# Altium PCB H7864-B-1.pcbdoc
Units mil, origin at the board's own origin, x right, y up, seen from the top; angles counter-clockwise.
Board outline 4210 x 5400 mil, 2 copper layers (Top Layer, Bottom Layer), stack 62.2 mil thick; 79 components, 38 nets, 224 pads, 40 vias.
Unrouted connection lines stored in the file: 1.
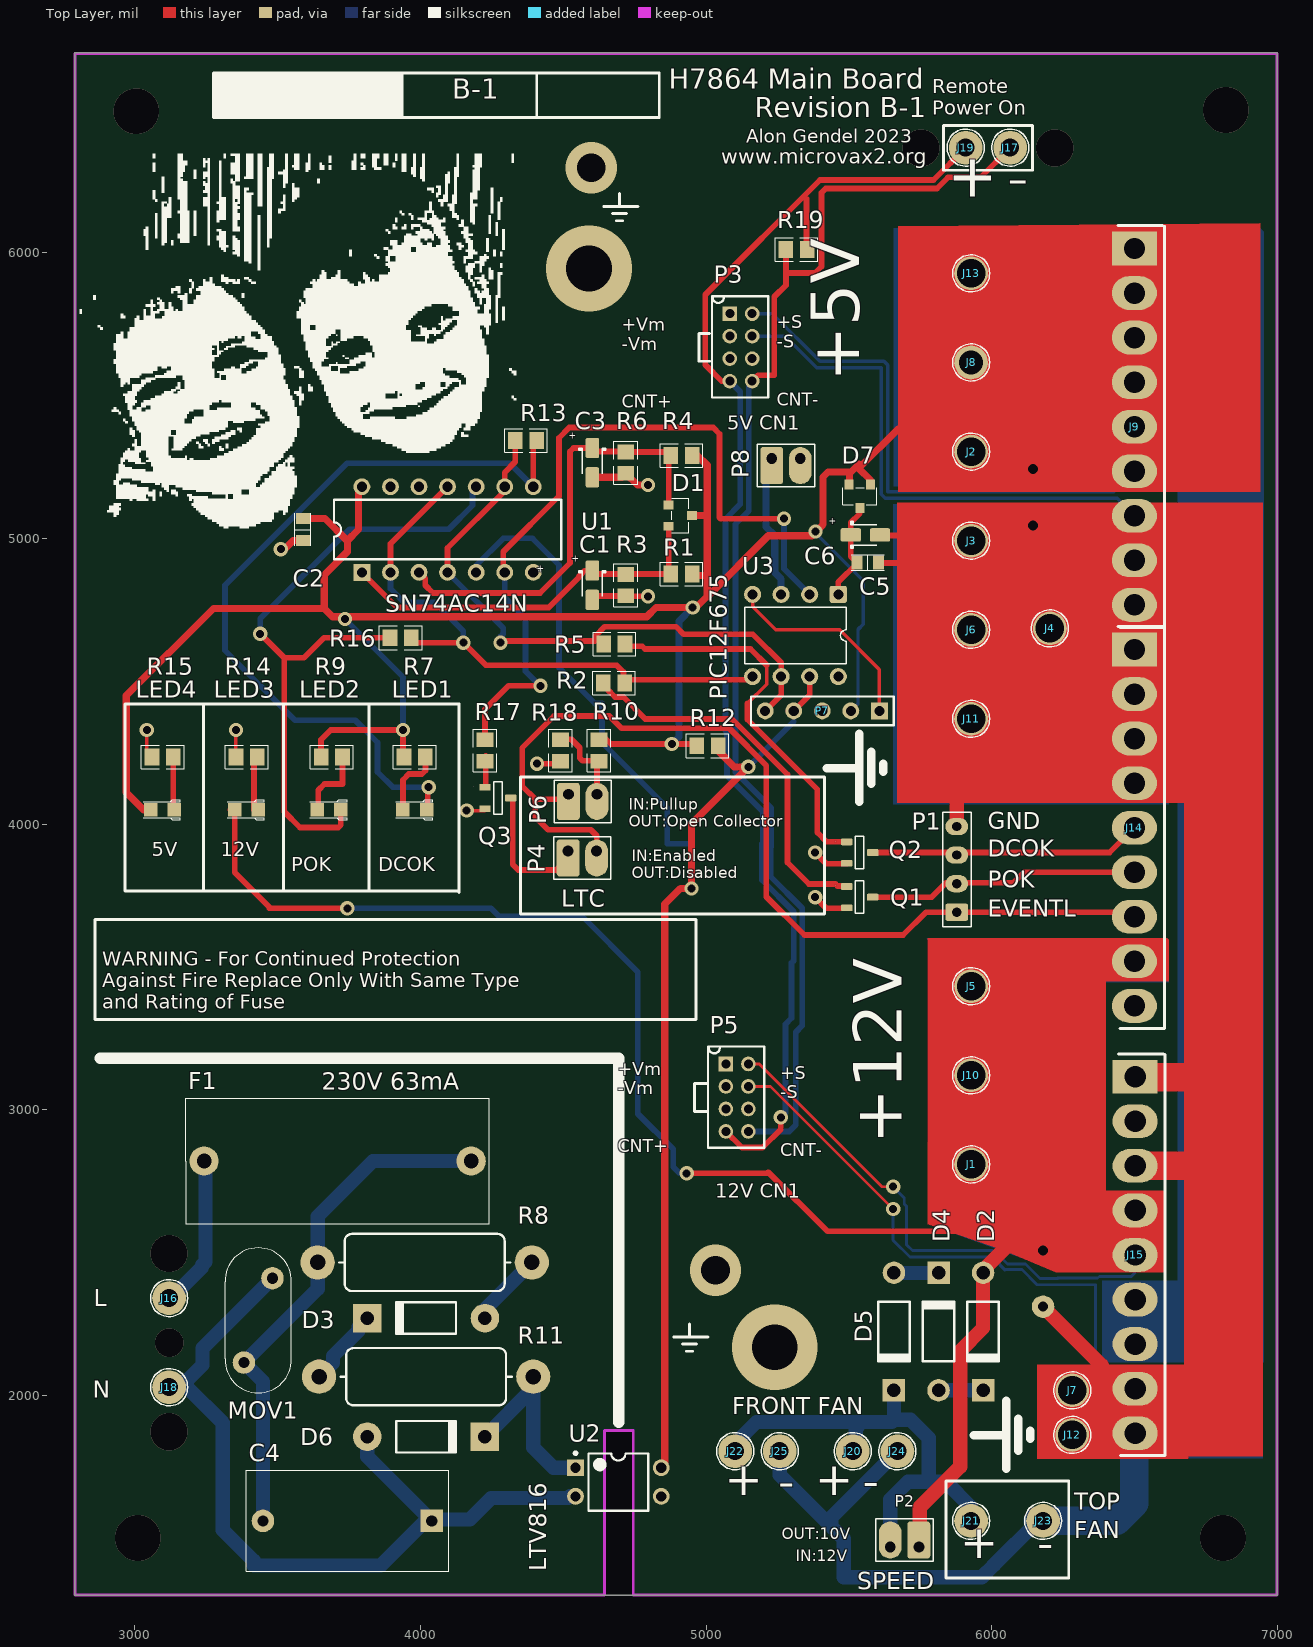
[diagram p0: Top Layer view]
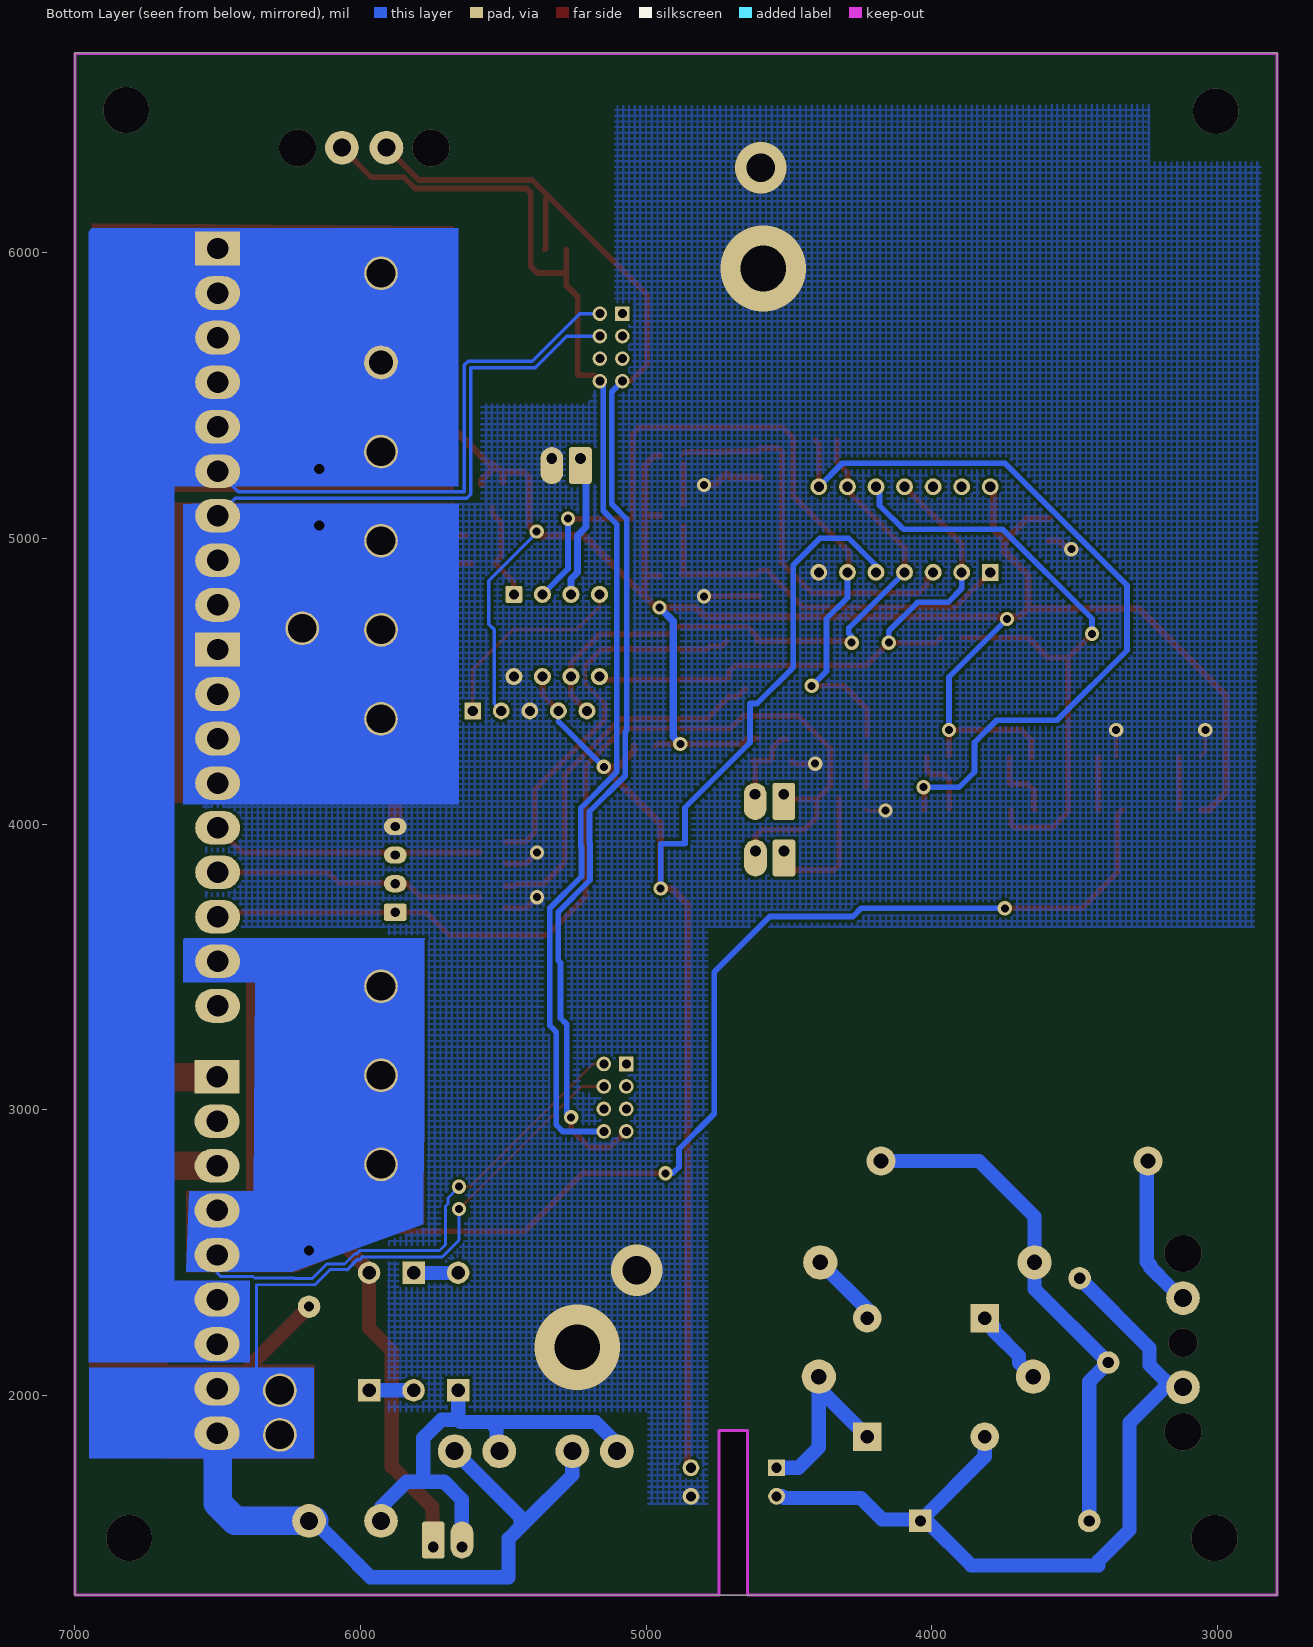
[diagram p1: Bottom Layer view, seen from below]
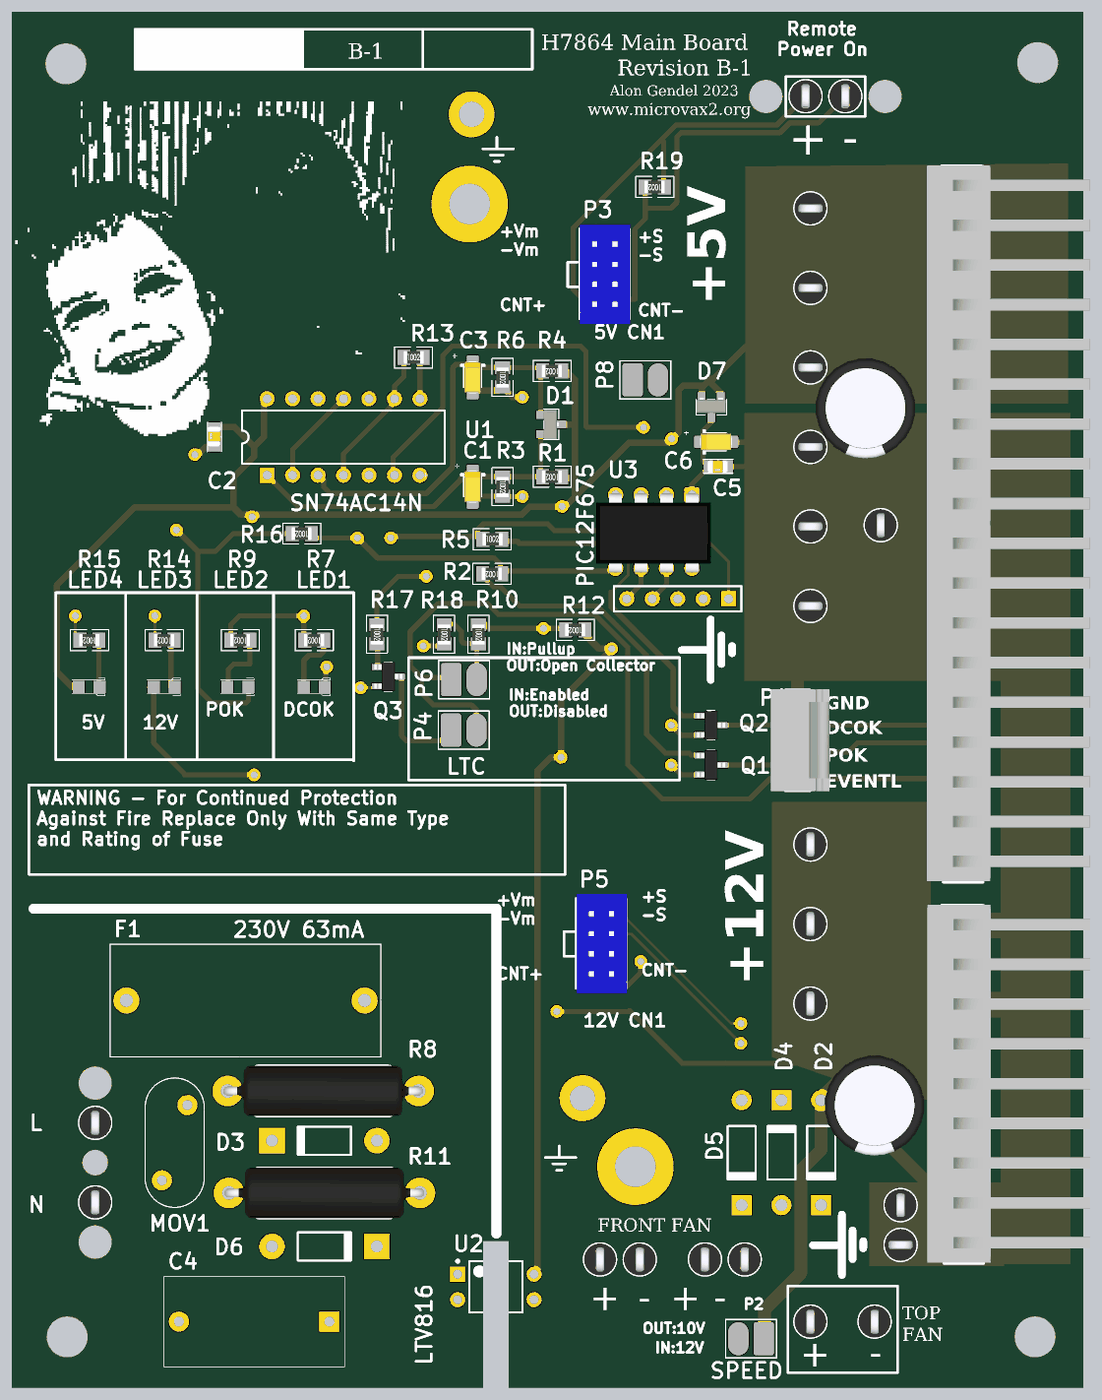
[diagram p2: 3D render of the assembled board from above, using the file's embedded part models]

## Layer stack, top to bottom
Top Solder: solder mask 0.4, Solder Resist, Dk 3.5
Top Layer: signal copper 1.4
Dielectric 1: dielectric 59.4, FR-4, Dk 4.8
Bottom Layer: signal copper 1.4
Bottom Solder: solder mask 0.4, Solder Resist, Dk 3.5

## Board outline
2790,6700 7000,6700 7000,1300 2790,1300
cut-out: 4643,1877 4643,1300 4743,1300 4743,1877

## Design rules (kind name [scope] priority, off if disabled: settings)
Clearance [All] p1: gap=10 ignorepadtopadclearanceinfootprint=FALSE except(0: Arc-Hole Track-Hole SMDPad-Hole THPad-Hole Via-Hole Fill-Hole Poly-Hole Region-Hole Text-Hole)
DiffPairsRouting [All] p1: maxlimit=10 minlimit=10 mostfreqgap=10 substack1={B6541F6F-5E9F-4CC3-B520-89411BB45DFE} toplayer_{b6541f6f-5e9f-4cc3-b520-89411bb45dfe}_minwidth=15 toplayer_{b6541f6f-5e9f-4cc3-b520-89411bb45dfe}_maxwidth=15 toplayer_{b6541f6f-5e9f-4cc3-b520-89411bb45dfe}_prefwidth=15 bottomlayer_{b6541f6f-5e9f-4cc3-b520-89411bb45dfe}_minwidth=15 bottomlayer_{b6541f6f-5e9f-4cc3-b520-89411bb45dfe}_maxwidth=15 bottomlayer_{b6541f6f-5e9f-4cc3-b520-89411bb45dfe}_prefwidth=15 substack2={062B99B7-EB38-4395-B046-2C45CFC6A055} toplayer_{062b99b7-eb38-4395-b046-2c45cfc6a055}_minwidth=15 toplayer_{062b99b7-eb38-4395-b046-2c45cfc6a055}_maxwidth=15 toplayer_{062b99b7-eb38-4395-b046-2c45cfc6a055}_prefwidth=15 bottomlayer_{062b99b7-eb38-4395-b046-2c45cfc6a055}_minwidth=15 bottomlayer_{062b99b7-eb38-4395-b046-2c45cfc6a055}_maxwidth=15 bottomlayer_{062b99b7-eb38-4395-b046-2c45cfc6a055}_prefwidth=15 substack3={27104A35-27B7-4900-9A83-A40C20FEE09A} toplayer_{27104a35-27b7-4900-9a83-a40c20fee09a}_minwidth=15 toplayer_{27104a35-27b7-4900-9a83-a40c20fee09a}_maxwidth=15 toplayer_{27104a35-27b7-4900-9a83-a40c20fee09a}_prefwidth=15 bottomlayer_{27104a35-27b7-4900-9a83-a40c20fee09a}_minwidth=15 bottomlayer_{27104a35-27b7-4900-9a83-a40c20fee09a}_maxwidth=15 bottomlayer_{27104a35-27b7-4900-9a83-a40c20fee09a}_prefwidth=15 substack4={332223C0-8223-4695-AB27-E20C30A78308} toplayer_{332223c0-8223-4695-ab27-e20c30a78308}_minwidth=15 toplayer_{332223c0-8223-4695-ab27-e20c30a78308}_maxwidth=15 toplayer_{332223c0-8223-4695-ab27-e20c30a78308}_prefwidth=15 bottomlayer_{332223c0-8223-4695-ab27-e20c30a78308}_minwidth=15 bottomlayer_{332223c0-8223-4695-ab27-e20c30a78308}_maxwidth=15 bottomlayer_{332223c0-8223-4695-ab27-e20c30a78308}_prefwidth=15 substack5={29FDEB50-212D-497E-900D-385B3C718162} toplayer_{29fdeb50-212d-497e-900d-385b3c718162}_minwidth=15 toplayer_{29fdeb50-212d-497e-900d-385b3c718162}_maxwidth=15 toplayer_{29fdeb50-212d-497e-900d-385b3c718162}_prefwidth=15 bottomlayer_{29fdeb50-212d-497e-900d-385b3c718162}_minwidth=15 bottomlayer_{29fdeb50-212d-497e-900d-385b3c718162}_maxwidth=15 bottomlayer_{29fdeb50-212d-497e-900d-385b3c718162}_prefwidth=15 toplayer_minwidth=15 toplayer_maxwidth=15 toplayer_prefwidth=15 bottomlayer_minwidth=15 bottomlayer_maxwidth=15 bottomlayer_prefwidth=15 substack6={DBA4801A-7DAA-44AE-8292-CCEAB1F1EA4C} toplayer_{dba4801a-7daa-44ae-8292-cceab1f1ea4c}_minwidth=15 toplayer_{dba4801a-7daa-44ae-8292-cceab1f1ea4c}_maxwidth=15 toplayer_{dba4801a-7daa-44ae-8292-cceab1f1ea4c}_prefwidth=15 bottomlayer_{dba4801a-7daa-44ae-8292-cceab1f1ea4c}_minwidth=15 bottomlayer_{dba4801a-7daa-44ae-8292-cceab1f1ea4c}_maxwidth=15 bottomlayer_{dba4801a-7daa-44ae-8292-cceab1f1ea4c}_prefwidth=15 substack7={5F3EFF92-351C-410F-9655-B944187F515E} toplayer_{5f3eff92-351c-410f-9655-b944187f515e}_minwidth=15 toplayer_{5f3eff92-351c-410f-9655-b944187f515e}_maxwidth=15 toplayer_{5f3eff92-351c-410f-9655-b944187f515e}_prefwidth=15 bottomlayer_{5f3eff92-351c-410f-9655-b944187f515e}_minwidth=15 bottomlayer_{5f3eff92-351c-410f-9655-b944187f515e}_maxwidth=15 bottomlayer_{5f3eff92-351c-410f-9655-b944187f515e}_prefwidth=15 substack8={4F476F13-3ADC-40E0-8F02-871E4650AD46} toplayer_{4f476f13-3adc-40e0-8f02-871e4650ad46}_minwidth=15 toplayer_{4f476f13-3adc-40e0-8f02-871e4650ad46}_maxwidth=15 toplayer_{4f476f13-3adc-40e0-8f02-871e4650ad46}_prefwidth=15 bottomlayer_{4f476f13-3adc-40e0-8f02-871e4650ad46}_minwidth=15 bottomlayer_{4f476f13-3adc-40e0-8f02-871e4650ad46}_maxwidth=15 bottomlayer_{4f476f13-3adc-40e0-8f02-871e4650ad46}_prefwidth=15 substack9={72A9B8E9-B9BB-42D8-A442-D8C7CA1ECA69} toplayer_{72a9b8e9-b9bb-42d8-a442-d8c7ca1eca69}_minwidth=15 toplayer_{72a9b8e9-b9bb-42d8-a442-d8c7ca1eca69}_maxwidth=15 toplayer_{72a9b8e9-b9bb-42d8-a442-d8c7ca1eca69}_prefwidth=15 bottomlayer_{72a9b8e9-b9bb-42d8-a442-d8c7ca1eca69}_minwidth=15 bottomlayer_{72a9b8e9-b9bb-42d8-a442-d8c7ca1eca69}_maxwidth=15 bottomlayer_{72a9b8e9-b9bb-42d8-a442-d8c7ca1eca69}_prefwidth=15 substack10={757BA2CB-C20F-4EA8-9C1E-70A47D1F9BCD} toplayer_{757ba2cb-c20f-4ea8-9c1e-70a47d1f9bcd}_minwidth=15 toplayer_{757ba2cb-c20f-4ea8-9c1e-70a47d1f9bcd}_maxwidth=15 toplayer_{757ba2cb-c20f-4ea8-9c1e-70a47d1f9bcd}_prefwidth=15 bottomlayer_{757ba2cb-c20f-4ea8-9c1e-70a47d1f9bcd}_minwidth=15 bottomlayer_{757ba2cb-c20f-4ea8-9c1e-70a47d1f9bcd}_maxwidth=15 bottomlayer_{757ba2cb-c20f-4ea8-9c1e-70a47d1f9bcd}_prefwidth=15 substack11={B6DE57BA-B454-4A1D-B12A-FBFFC8313119} toplayer_{b6de57ba-b454-4a1d-b12a-fbffc8313119}_minwidth=15 toplayer_{b6de57ba-b454-4a1d-b12a-fbffc8313119}_maxwidth=15 toplayer_{b6de57ba-b454-4a1d-b12a-fbffc8313119}_prefwidth=15 bottomlayer_{b6de57ba-b454-4a1d-b12a-fbffc8313119}_minwidth=15 bottomlayer_{b6de57ba-b454-4a1d-b12a-fbffc8313119}_maxwidth=15 bottomlayer_{b6de57ba-b454-4a1d-b12a-fbffc8313119}_prefwidth=15 maxuncoupledlength=500
PolygonConnect [All] p1: connectstyle=Direct reliefconductorwidth=10 reliefentries=4 polygonreliefangle="90 Angle" airgapwidth=10
RoomDefinition Indicators [InComponentClass('Indicators')] p1: confinementstyle=ConfineIn formatcopy=TRUE lockcomponents=FALSE outline 0,0 2000,0 2000,1000 0,1000
RoomDefinition H7864 [InComponentClass('H7864')] p2: confinementstyle=ConfineIn formatcopy=TRUE lockcomponents=FALSE outline 2320,3730 2535,3730 2535,5260 2320,5260
RoutingVias [All] p1: holewidth=28 width=50 viastyle="Through Hole" minholewidth=28 minwidth=50 maxholewidth=28 maxwidth=50
SolderMaskExpansion [All] p1: expansion=4 istentingtop=FALSE
Width [All] p1: maxlimit=700 minlimit=10 preferedwidth=10 substack1={B6541F6F-5E9F-4CC3-B520-89411BB45DFE} substack2={062B99B7-EB38-4395-B046-2C45CFC6A055} substack3={27104A35-27B7-4900-9A83-A40C20FEE09A} substack4={332223C0-8223-4695-AB27-E20C30A78308} substack5={29FDEB50-212D-497E-900D-385B3C718162} substack6={DBA4801A-7DAA-44AE-8292-CCEAB1F1EA4C} substack7={5F3EFF92-351C-410F-9655-B944187F515E} substack8={4F476F13-3ADC-40E0-8F02-871E4650AD46} substack9={72A9B8E9-B9BB-42D8-A442-D8C7CA1ECA69} substack10={757BA2CB-C20F-4EA8-9C1E-70A47D1F9BCD} substack11={B6DE57BA-B454-4A1D-B12A-FBFFC8313119} minimp=50.000000 maximp=50.000000 favimp=50.000000
29 further rules are at their usual default settings.

## Classes and differential pairs
component class Indicators: LED1 LED2 LED3 LED4 R7 R9 R13 R14 R15 R16

## Components (designator, comment, footprint, x,y, rotation, side; value= is the part's Value field where it differs from the comment)
C1 "10uF" CAPMP3216X180N 4602,4836 r270 top
C2 "VJ0805Y103JXAPW1BC" C0805-S 3588,5031 r90 top value="0.01uF 0805"
C3 "100uF" CAPMP3216X180N 4602,5265 r270 top
C4 "" MKP-3381-15 3744,1560 r180 top value="47nF 400V"
C5 "VJ0805Y103JXAPW1BC" C0805-S 5566,4916 r180 top value="0.1uF 0805"
C6 "100uF" CAPMP3216X180N 5558,5012 r0 top
D1 "BAT54C" SOT23 4910,5080 r270 top value="Dual Diode SOT23 Schottky"
D2 "" DO-204AL#1 5970,2223 r270 top value=1N4007
D3 "" DO-204AL#2 4020,2270 r180 top value=1N4007
D4 "" DO-204AL#1 5814,2223 r90 top value=1N4007
D5 "" DO-204AL#1 5658,2223 r270 top value=SB130-T
D6 "" DO-204AL#2 4020,1855 r0 top value=1N4007
D7 "BAT54C" SOT23 5538.5,5148 r180 top value="Dual Diode SOT23 Schottky"
F1 "63mA" "FUSE HOLDER 656" 3710,2820 r180 top
J1 "Wire Solder" TP-THT-MULTI#1 5928,2808 r0 top
J2 "Wire Solder" TP-THT-MULTI#1 5928,5304 r90 top
J3 "Wire Solder" TP-THT-MULTI#1 5928,4992 r90 top
J4 "Wire Solder" TP-THT-MULTI#2 6204,4685 r0 top
J5 "Wire Solder" TP-THT-MULTI#1 5928,3432 r0 top
J6 "Wire Solder" TP-THT-MULTI#1 5928,4680 r90 top locked
J7 "Wire Solder" TP-THT-MULTI#2 6282,2017 r0 top
J8 "Wire Solder" TP-THT-MULTI#3 5928,5616 r90 top
J9 "1-640385-9" MTA156-9 6500,6015 r0 top
J10 "Wire Solder" TP-THT-MULTI#1 5928,3120 r0 top
J11 "Wire Solder" TP-THT-MULTI#1 5928,4368 r90 top
J12 "Wire Solder" TP-THT-MULTI#1 6282,1861 r90 top
J13 "Wire Solder" TP-THT-MULTI#1 5928,5928 r90 top
J14 "1-640385-9" MTA156-9 6500,4611 r0 top
J15 "1-640385-9" MTA156-9 6502,3115 r0 top locked
J16 "Wire Solder" TP-THT-MULTI#4 3120,2340 r0 top
J17 "Remote On Off -" TP-THT-MULTI#4 6065,6368 r180 top
J18 "Wire Solder" TP-THT-MULTI#4 3120,2028 r0 top
J19 "Remote On Off +" TP-THT-MULTI#4 5909,6368 r180 top
J20 "FAN+" TP-THT-MULTI#4 5514,1804 r0 top
J21 "FAN+" TP-THT-MULTI#4 5928,1560 r0 top
J22 "FAN+" TP-THT-MULTI#4 5102,1804 r0 top
J23 "FAN-" TP-THT-MULTI#4 6180,1560 r0 top
J24 "FAN-" TP-THT-MULTI#4 5670,1804 r0 top
J25 "FAN-" TP-THT-MULTI#4 5258,1804 r0 top
LED1 "LTST-C170KRKT" LTST-C170 3980,4050 r180 top value=EL-17-21SURC/S530-A2/TR8
LED2 "LTST-C170KRKT" LTST-C170 3680,4050 r180 top value=EL-17-21SURC/S530-A2/TR8
LED3 "LTST-C170TGKT" LTST-C170 3390.89,4050 r180 top value=EL-17-21SURC/S530-A2/TR8
LED4 "LTST-C170TGKT" LTST-C170 3096.34,4050 r180 top value=EL-17-21SURC/S530-A2/TR8
MOV1 "TVB7S471KR 10mm disc" TVR1010 3432,2262 r270 top
P1 "Programmer" HDR1X4_2.54MMP 5878,3691 r90 top
P2 "Header" HDR_1x2_Offset 5695,1468 r270 top
P3 "B8B-PHDSS(LF)(SN)" B8B-PHDSS 5083,5786.74 r0 top
P4 "Header" HDR_1x2_Offset 4567,3906 r90 top
P5 "B8B-PHDSS(LF)(SN)" B8B-PHDSS 5069.26,3159.74 r0 top
P6 "Header" HDR_1x2_Offset 4568,4104 r90 top
P7 "Header 5" HDR1X5 5607,4396 r180 top
P8 "Header" HDR_1x2_Offset 5280,5280 r90 top
Q1 "SI2306BDS-T1-E3" SOT23-3 5538,3744 r0 top
Q2 "SI2306BDS-T1-E3" SOT23-3 5538,3900 r0 top
Q3 "SI2306BDS-T1-E3" SOT23-3 4271,4091 r0 top
R1 "26.1K 1%" 2012[0805] 4914,4875 r180 top
R2 "CRCW080547K0FKEA" 2012[0805] 4678,4494 r180 top value=1K
R3 "180K 1%" 2012[0805] 4719,4836 r270 top
R4 "" 2012[0805] 4914,5290 r180 top value="10K 1%"
R5 "CRCW080547K0FKEA" 2012[0805] 4679,4630 r0 top value=1K
R6 "180K 1%" 2012[0805] 4719,5265 r270 top
R7 "330" 2012[0805] 3980,4234 r180 top
R8 "" RESTH_AXIAL_MRA-05 4015,2465 r0 top value="22K 1W"
R9 "330" 2012[0805] 3689.6,4234 r180 top
R10 "CRCW080547K0FKEA" 2012[0805] 4625,4257 r270 top value=178
R11 "" RESTH_AXIAL_MRA-05 4020,2065 r0 top value="22K 1W"
R12 "CRCW080547K0FKEA" 2012[0805] 5005,4274 r180 top value=10K
R13 "CRCW080547K0FKEA" 2012[0805] 4369.6,5343 r0 top value=0
R14 "2K" 2012[0805] 3391.6,4234 r180 top
R15 "330" 2012[0805] 3097.4,4234 r180 top
R16 "CRCW080547K0FKEA" 2012[0805] 3931,4652 r180 top value=0
R17 "CRCW080547K0FKEA" 2012[0805] 4226,4257 r270 top value=1K
R18 "CRCW080547K0FKEA" 2012[0805] 4490,4257 r270 top value=383
R19 "CRCW080547K0FKEA" 2012[0805] 5317,6012 r180 top value=1K
U1 "SN74AC14" J014 4095,5031 r0 top
U2 "LTV816" DIP-4 4693,1696 r0 top
U3 "PIC12F675-I/P" DIP8-300 5313,4660 r270 top
? "Comment" CAPE5.0mm#1 6144.41,5144.02 r270 top
? "Comment" CAPE5.0mm#2 6180,2408.43 r270 top

## Footprints (in the part's own frame and the unit in brackets; to place one, negate y for a bottom-side part, rotate by r counter-clockwise, add the part's x,y. Pads: shape width x height; smd on the part's side, far side on the other; paste and mask are expansions set on the pad)
2012[0805] [mm] "Chip Resistor; Body 2.0 x 1.3 mm (LxW typ)"
  rect 1.3x1.5 smd: 1(-0.95,0) 2(0.95,0)
  silkscreen extent -1.9,-1.05 1.9,1.05, body extent -0.97,-0.62 1.03,0.63, height 0.5
B8B-PHDSS [mm]
  rect 1.3x1.3 hole 0.8: 1(0,0)
  round 1.3 hole 0.8: 2(2,0) 3(0,-2) 4(2,-2) 5(0,-4) 6(2,-4) 7(0,-6) 8(2,-6)
  silkscreen extent -1.58,-7.46 3.42,1.56, body extent -1.53,-7.92 3.47,1.98, height 6.5
C0805-S [mil]
  rect 39x49 smd: 1(-38,0) 2(38,0)
  silkscreen extent -58,-28 58,28, body extent -37,-24 41,26, height 31
CAPE5.0mm#1 [mm]
  rrect25% 0x0 hole 0.9 paste-2.54 mask-2.54: 1(-2.5,0)
  round 0 hole 0.9 paste-2.54 mask-2.54: 2(2.5,0)
  body extent -4.96,-4.97 4.95,4.96, height 20
CAPE5.0mm#2 [mm]
  rrect25% 0x0 hole 0.9 paste-2.54 mask-2.54: 1(-2.5,0)
  round 2 hole 0.9: 2(2.5,0)
  body extent -4.96,-4.97 4.95,4.96, height 20
CAPMP3216X180N [mm] "Capacitor, polarized, Molded Body, EIA 535BAAC size A; 3.20mm L X 1.60mm W X 1.80mm H"
  round 0.508 on Mech15: 0(0,0)
  rrect25% 1.8x1.2 smd: 1(-1.3,0) 2(1.3,0)
  silkscreen extent -1.3,-1.2 1,1.2, body extent -1.6,-0.8 1.6,0.8, height 1.8
DIP8-300 [mil] "DIP, 8-Leads, 0.300\" lead span , 0.100\" lead pitch, IPC Density A"
  round 39.37 on Mech15: 0(0,0)
  rrect25% 60x60 hole 35: 1(-144,150)
  round 60 hole 35: 2(-144,50) 3(-144,-50) 4(-144,-150) 5(144,-150) 6(144,-50) 7(144,50) 8(144,150)
  silkscreen extent -98,-177 98,177, body extent -149,-225 161,225, height 165
DIP-4 [mm] "DIP; 4 Leads; Row Spacing 7.62 mm; Pitch 2.54 mm"
  rect 1.5x1.5 hole 0.9: 1(-3.81,1.27)
  round 1.5 hole 0.9: 2(-3.81,-1.27) 3(3.81,-1.27) 4(3.81,1.27)
  silkscreen extent -3.93,-2.55 2.65,2.69, body extent -3.15,-2.5 3.15,2.5, height 5.6
DO-204AL#1 [mm] "Diode, Axial; Body 5.2 x 2.7 mm (LxDia. max), Lead Dia. 0.86 mm (max)"
  round 2 hole 1.2: 1(-5.23,0)
  rect 2x2 hole 1.2: 2(5.23,0)
  silkscreen extent -2.65,-1.4 2.75,1.4
DO-204AL#2 [mm] "Diode, Axial; Body 5.2 x 2.7 mm (LxDia. max), Lead Dia. 0.86 mm (max)"
  round 2.54 hole 1.2: 1(-5.23,0)
  rect 2.54x2.54 hole 1.2: 2(5.23,0)
  silkscreen extent -2.65,-1.4 2.75,1.4
"FUSE HOLDER 656" [mm]
  round 2.6 hole 1.3: 1(-11.875,0) 2(11.875,0)
  silkscreen extent -13.5,-5.6 13.5,5.6, body extent -12.5,-5.4 12.5,5.4, height 12.7
HDR1X4_2.54MMP [mil] "Connector; Header; 4 Position 0.100\" pitch"
  rrect25% 60x80 hole 32: 1(0,0)
  oval 60x80 hole 32: 2(100,0) 3(200,0) 4(300,0)
  silkscreen extent -50,-50 350,50, body extent -50,-125 350,105, height 395
HDR1X5 [mm] "Connector; Header; 5 Position"
  rect 1.5x1.5 hole 0.9: 1(0,0)
  round 1.5 hole 0.9: 2(2.54,0) 3(5.08,0) 4(7.62,0) 5(10.16,0)
  silkscreen extent -1.27,-1.27 11.43,1.27
HDR_1x2_Offset [mil]
  rrect25% 130x80 smd: 1(-25,50)
  rrect25% 130x80 smd far side: 1(-25,50)
  rrect25% 60x60 hole 38: 1(0,50)
  oval 130x80 smd: 2(-25,-50)
  oval 130x80 smd far side: 2(-25,-50)
  round 60 hole 38: 2(0,-50)
  silkscreen extent -100,-100 50,100
J014 [mm] "DIP; 14 Leads; Row Spacing 7.62 mm; Pitch 2.54 mm"
  rect 1.5x1.5 hole 0.9: 1(-7.62,-3.81)
  round 1.5 hole 0.9: 2(-5.08,-3.81) 3(-2.54,-3.81) 4(0,-3.81) 5(2.54,-3.81) 6(5.08,-3.81) 7(7.62,-3.81) 8(7.62,3.81) 9(5.08,3.81) 10(2.54,3.81) 11(0,3.81) 12(-2.54,3.81) 13(-5.08,3.81) 14(-7.62,3.81)
  silkscreen extent -10.1,-2.65 10.1,2.65
LTST-C170 [mm]
  rect 1.2x1.2 smd: A(1.05,0) K(-1.05,0)
  silkscreen extent -1.6,-0.87 1.7,0.87, body extent -1,-0.63 1,0.63, height 1.1
MKP-3381-15 [mm]
  rect 2x2 hole 1: 1(-7.5,0)
  round 2 hole 1: 2(7.5,0)
  silkscreen extent -9,-4.5 9,4.5, body extent -8.75,-4.25 8.75,4.25, height 16.5
MTA156-9 [mm]
  rect 4x3 hole 1.905: 1(0,0)
  oval 4x3 hole 1.905: 2(0,-3.962) 3(0,-7.925) 4(0,-11.887) 5(0,-15.85) 6(0,-19.812) 7(0,-23.774) 8(0,-27.737) 9(0,-31.699)
  silkscreen extent -1.46,-33.69 2.68,2.03, body extent -2.93,-33.61 13.33,2.06, height 4.7
RESTH_AXIAL_MRA-05 [mil] "MRA-05 Axial Resistor Thru-Hole; 2 Leads"
  round 50 on Mech15: 0(0,0)
  round 120 hole 54: 1(-375,0) 2(375,0)
  silkscreen extent -300,-100 300,100, body extent -392,-99 392,99, height 197
SOT23 [mil]
  rect 31x35 smd: 1(-37.5,-41) 2(37.5,-41) 3(0,41)
  silkscreen extent -60,-30 60,30, body extent -57,-51 57,44, height 19
SOT23-3 [mm] "SOT23, 3 pin"
  round 0.5 on Mech15: 0(0,0)
  rrect25% 1x0.6 smd: 1(-1.15,0.95) 2(-1.15,-0.95) 3(1.15,0)
  silkscreen extent -0.38,-1.45 0.38,1.45, body extent -1.4,-1.45 1.4,1.45, height 1.29
TP-THT-MULTI#1 [mm] "Thru-hole test point loop"
  round 3 hole 2.54: 1(0,0)
  silkscreen extent -1.65,-1.65 1.65,1.65, body extent -1.6,-1.6 1.6,1.59, height 8.09
TP-THT-MULTI#2 [mm] "Thru-hole test point loop"
  round 3 hole 2.54 mask-5.08: 1(0,0)
  silkscreen extent -1.65,-1.65 1.65,1.65, body extent -1.6,-1.6 1.6,1.59, height 8.09
TP-THT-MULTI#3 [mm] "Thru-hole test point loop"
  round 3 hole 2.159: 1(0,0)
  silkscreen extent -1.65,-1.65 1.65,1.65, body extent -1.6,-1.6 1.6,1.59, height 8.09
TP-THT-MULTI#4 [mm] "Thru-hole test point loop"
  round 3 hole 1.6: 1(0,0)
  silkscreen extent -1.65,-1.65 1.65,1.65, body extent -1.6,-1.6 1.6,1.59, height 8.09
TVR1010 [mm]
  round 2 hole 1: 1(-3.75,1.27) 2(3.75,-1.27)
  silkscreen extent -6.45,-2.95 6.45,2.95, body extent -6.25,-2.85 6.25,2.85, height 10

## Part data
C1 C3 C6: library part CAPT_68u_3216_6V3, "Capacitor SMD Tantalum 68uF 10% 6.3V EIA 3216-18", ESR (Equivalent Series Resistance)="4.000 Ohm", Manufacturer 1=Kemet, Manufacturer Part Number 1=T491A686K006AT, Manufacturer Size Code=A, Operating Temperature="-55°C ~ 125°C", Package / Case="1206 (3216 Metric)", Ratings=6.3V, Supplier Part Number 1=399-4698-1-ND, Tolerance=±10%, ComponentLink1Description=http://www.kemet.com/datasheets&T491A686K006AT, ComponentLink1URL=http://www.kemet.com/datasheets&T491A686K006AT, Height - Seated (Max)="0.071\" (1.80mm)", Material="Solid Tantalum", SCDType=spec, Size / Dimension="0.126\" L x 0.063\" W (3.20mm x 1.60mm)", Supplier 1=Digi-Key
  C1: P/N=TAJS106K006RNJ
  C3 C6: P/N=TCTAS0J107M8R
C2 C5: library part CAP, "Capacitor", Manufacturer=Vishay
  C2: P/N=VJ0805Y103JXQPW1BC
  C5: P/N=VJ0805Y104KXQCW1BC
C4: library part Cap, "Capacitor", LatestRevisionDate=17-Jul-2002, LatestRevisionNote="Re-released for DXP Platform.", P/N=B32642B6473J, PackageReference=RAD-0.3, Published=8-Jun-2000, Publisher="Altium Limited"
D1 D7: "Schottky Barrier Double Diode", ComponentLink1Description="Manufacturer Link", ComponentLink1URL=http://www.semiconductors.philips.com/, ComponentLink2Description=Datasheet, ComponentLink2URL=http://www.semiconductors.philips.com/acrobat/datasheets/BAT54_SERIES_4.pdf, DatasheetVersion=4-Mar-2002, LatestRevisionDate=12-Dec-2006, LatestRevisionNote="IPC-7351 Footprint Added.", P/N=BAT54C, PackageDescription="3-Pin SOT-23 Package 0.95 mm Pitch, 2.3 mm Lead Span", PackageReference=SOT23, PackageVersion=May-1999, Published=17-Sep-2003, Publisher="Altium Limited"
D2 D3 D4 D5 D6: library part "Diode 1N4007", "1 Amp General Purpose Rectifier", Code_JEDEC=DO-204-AL, ComponentLink1Description="Manufacturer Link", ComponentLink1URL=http://www.fairchildsemi.com/, ComponentLink2Description=Datasheet, ComponentLink2URL=http://www.fairchildsemi.com/ds/1N%2F1N4001.pdf, DatasheetVersion=1998, LatestRevisionDate=17-Jul-2002, LatestRevisionNote="Re-released for DXP Platform.", PackageDescription="Diode, Axial; Body 5.2 x 2.7 mm (LxDia. max), Lead Dia. 0.86 mm (max)", PackageReference=DO-41, PackageVersion=Aug-1999, Published=8-Jun-2000, Publisher="Altium Limited"
  D2 D3 D4 D6: P/N=1N4007
  D5: P/N=SB130-T
F1: library part "Fuse 1", "Fuse Holder 65600001009  + cover 65900000009", LatestRevisionDate=17-Jul-2002, LatestRevisionNote="Re-released for DXP Platform.", P/N=65600001009, PackageReference=PIN-W2/E2.8, Published=8-Jun-2000, Publisher="Altium Limited"
J1 J2 J3 J4 J5 J6 J7 J8 J10 J11 J12 J13 J16 J17 J18 J19 J20 J21 J22 J23 J24 J25: library part Socket, "Socket", LatestRevisionDate=17-Jul-2002, LatestRevisionNote="Re-released for DXP Platform.", Publisher="Altium Limited"
  J19: P/N=640388-2
LED1 LED2 LED3 LED4: library part LED, P/N=LTST-C170KRKT
MOV1: library part "Res Varistor", "Varistor (Voltage-Sensitive Resistor)", Code_IPC=RESC2012, LatestRevisionDate=29-May-2009, LatestRevisionNote="IPC-7351 Footprint Added.", P/N=TVB7S471KR, PackageDescription="Chip Resistor 0805 Case Size", PackageReference=6-0805, PackageVersion=Mar-2003, Published=24-Mar-1999, Publisher="Altium Limited"
P1: library part Header4P, "Header 4-pin"
P2 P4 P6 P8: library part Header2P, "Header, 2-pin", P/N=61300211121
P7: "Header, 5-Pin", LatestRevisionDate=17-Jul-2002, LatestRevisionNote="Re-released for DXP Platform.", Publisher="Altium Limited"
Q1 Q2 Q3: library part MOSFET-N, "N-Channel MOSFET", Manufacturer=Vishay, PackageDocument=1995/1996, Alt P/N=DMN3404L-7, LatestRevisionDate=17-Jul-2002, LatestRevisionNote="Re-released for DXP Platform.", P/N=SI2306BDS-T1-E3, PackageReference=E3, Published=8-Jun-2000, Publisher="Altium Limited"
R1 R2 R3 R4 R5 R6 R7 R9 R10 R12 R13 R14 R15 R16 R17 R18 R19: library part Res3, "Resistor", LatestRevisionDate=04-Mar-2005, LatestRevisionNote="PCB Footprint replaced.", PackageReference=J1-0603, Published=8-Jun-2000, Publisher="Altium Limited"
  R1: P/N=CRCW080526K1FKEA
  R2 R5 R17 R19: P/N=CRCW08051K00FKEAC
  R3 R6: P/N=CRCW0805180KFKEAC
  R4 R12: P/N=CRCW080510K0JNEAC
  R7 R9 R15: P/N=CRCW0805330RFKEB
  R10: P/N=CRCW0805178RFKEA
  R13 R16: P/N=CRCW08050000Z0EC
  R14: P/N=CRCW08052K00FKEAHP
  R18: P/N=CRCW0805383RFKEA
R8 R11: library part Res2, "Resistor", LatestRevisionDate=17-Jul-2002, LatestRevisionNote="Re-released for DXP Platform.", P/N=MOS1CT528R223J, PackageDescription="Axial Device, Thru-Hole; 2 Leads; 0.4 in Pin Spacing", PackageReference=AXIAL-0.4, Published=8-Jun-2000, Publisher="Altium Limited"
U1: library part SN74AHCT14D, "Hex Schmitt-Trigger Inverter", Code_IPC=SOIC127P600-14, ComponentLink1Description="Manufacturer Link", ComponentLink1URL=http://www.ti.com/, ComponentLink2Description=Datasheet, ComponentLink2URL=http://www-s.ti.com/sc/ds/sn74ahct14.pdf, ComponentLink3Description="Packaging Specification", ComponentLink3URL=http://focus.ti.com/lit/ml/mpds177/mpds177.pdf, DatasheetVersion=Apr-1999, LatestRevisionDate=13-Apr-2006, LatestRevisionNote="IPC-7351 Footprint Added.", P/N=SN74AHCT14D, PackageDescription="14-Pin Small Outline Integrated Circuit 1.27 mm Pitch", PackageReference=D014, PackageVersion=Jan-1998, Published=8-Jun-2000, Publisher="Altium Limited"
U2: library part Optoisolator1, "4-Pin Phototransistor Optocoupler", DatasheetVersion=Nov-2003, LatestRevisionDate=04-Mar-2005, LatestRevisionNote="Sch pins 3 & 4 Swapped.", P/N=LTV816, PackageReference=DIP-4, Published=24-Mar-1999, Publisher="Altium Limited"
U3: "FLASH-Based 8-Bit CMOS Microcontroller, 10-Bit A/D, 8-Pin PDIP, Industrial Temperature", Supplier Part Number 1=PIC12F675-I/P-ND, Code_JEDEC=MS-001, ComponentLink1Description=Datasheet, ComponentLink1URL=http://ww1.microchip.com/downloads/en/DeviceDoc/41190F.pdf, ComponentLink2Description="Packaging Specification", ComponentLink2URL=http://www.microchip.com/stellent/groups/techpub_sg/documents/packagingspec/en012702.pdf, ComponentLink3Description="Microchip.com Home", ComponentLink3URL=http://www.microchip.com/, DatasheetVersion="revF, Sep-2009", LatestRevisionDate=02-Dec-2009, LatestRevisionNote="Updated to datasheet revision revF, Sep-2009.", Note="Refer to data sheet (DS41190F) for details of supply voltage range under different conditions.", PackageDescription="8-Lead Plastic Dual In-Line (P) - 300 mil Body [PDIP]", PackageReference=PDIP300-P8, PackageVersion="revBB, Aug-2009", Published=11-Oct-2004, Publisher="Altium Limited", Supplier 1=Digi-Key, Supplier 2=Farnell, Supplier 3=Farnell, Supplier 4=Farnell, Supplier Part Number 2=9759018, Supplier Part Number 3=1523921, Supplier Part Number 4=4362640
J9 J14 J15: P/N=640385-9
P3 P5: P/N=B8B-PHDSS(LF)(SN)

## Via types
v1: diameter 50, hole 28, Top Layer to Bottom Layer, 27 vias
v2: diameter 160, hole 160, Top Layer to Bottom Layer, 4 vias
v3: diameter 130, hole 130, Top Layer to Bottom Layer, 4 vias
v4: diameter 300, hole 160, Top Layer to Bottom Layer, 2 vias
v5: diameter 180, hole 100, Top Layer to Bottom Layer, 2 vias
v6: diameter 100, hole 100, Top Layer to Bottom Layer, 1 vias

## Nets (pads, with @x,y where several pads share a name; then routed paths per layer and width w, separated by ;. In a path a pad name is that pad's centre, name@x,y a point inside that pad or via, vN(x,y) a via of type N, cw(c..) or ccw(c..) an arc to the next point about the centre after c; other vN are vias at no path point)
+5V: ?.1@6144.41,5242.44 C2.2 D1.3 D7.1 D7.2 J2.1 J8.1 J9.1 J9.2 J9.3 J9.4 J9.5 J9.6 J13.1 J15.6 J15.7 LED4.A P3.2 P7.2 R1.1 R4.1 R7.2 R9.2 R10.1 R12.2 U1.14 | length 9658.1
  Top Layer w12: R7.2@3939,4238.6 R7.2@3942.6,4235
  Top Layer w20: R9.2 3652.2,4295.2 3686,4329 v1(3939,4329) R7.2@3939,4238.6 ; R10.1@4610,4299.4 4648,4299.4 4667.4,4280 v1(4880,4280) 4961.6,4280 R12.2
  Top Layer w25: LED4.A 3030,4050 2970,4110 2970,4450 3275.01,4755.01 3663.01,4755.01 ; C2.2@3588,5070 3666,5070 3744,4992 ; U1.14@3797,5179 3783,5165 3783,5031 3744,4992 ; D1.3 5004,5080 ; R4.1 4970,5290 5004,5256 5004,5080 ; R1.1@4953,4870 5004,4870 ; D7.2@5502,5198 5502,5226 5508,5232 ; D7.1 5576,5204 5536,5244 5536,5246 ; 5830,5385 5675,5385 5536,5246 ; 3663.01,4755.01 3663.01,4872.01 3744,4953 3744,4992 ; 3663.01,4755.01 3692.53,4725.5 4792.68,4725.5 4825.18,4758 v1(4953,4758) 4965,4758 5002,4795 5004,4795 ; 5004,4795 5004,4870 ; 5004,4795 5218,5009 5371,5009 5410,5048 5410,5215 5427,5232 5508,5232 ; 5004,4870 5004,5080 ; 5508,5232 5536,5260 5536,5246
  Bottom Layer w10: v1(4880,4280) v1@4885,4285
  Bottom Layer w12: P3.2 5232.26,5786.74 5399,5620 5623.11,5620 5636,5607.11 5636,5163 6428,5163 J9.6 ; v1(5383,5024) 5383,5019 5551,4851 5551,4700 5532,4681 5532,4421 P7.2
  Bottom Layer w20: v1(3736,4718) 3939,4515 v1(3939,4329)
  Bottom Layer w25: v1@4885,4285 4905,4305 4905,4710 v1(4953,4758)
+12V: ?.1@6180,2506.85 D2.1 J1.1 J5.1 J10.1 J14.8 J15.4 J15.5 LED3.A P2.1 P5.2 | length 6723.4
  Top Layer w10: P5.2 5186.26,3159.74 5616,2730 v1(5655,2730)
  Top Layer w20: LED3.A@3333.66,4050 3350,4033.66 3350,3830 3473,3707 3471,3705 v1(3744,3705) ; v1(4932,2777) 5213.94,2777 5217.94,2781 5424.94,2574 5867.19,2574
  Top Layer w50: P2.1@5745,1493 5748,1496 5748,1608 5890,1750 5890,2155 5970,2235 D2.1 ; D2.1@5960.91,2428.91 6079,2547 6161,2547
  Bottom Layer w10: v1(5655,2730) 5694,2691 5694,2669.57 5702,2661.57 5702,2527 5722.72,2506.28 6002.05,2506.28 ; 6012.32,2496 6013.32,2495 6020.7,2495 6055.7,2460 6118,2460 6169,2409 6232,2409 ; 6231,2410 6371,2410 6377,2416 6489,2416 6502,2429 J15.5@6502,2446
  Bottom Layer w12: 6002.05,2506.28 6012.32,2496 ; 6083.49,2499.83 6088.94,2505.28 ; 6231,2410 6232,2409 ; J15.5@6502,2446 J15.5
  Bottom Layer w20: v1(3744,3705) 4247,3705 4276,3676 4567,3676 4761,3482 4761,2985.57 4885,2861.57 4885,2799 4907,2777 v1(4932,2777) ; 4905,2779 v1@4915,2779
BDCOK: J14.5 P1.3 Q2.3 | length 952.8
  Top Layer w20: Q2.3 6413,3900 J14.5
BEVENTL: J14.7 P1.1 P4.2 P6.1 | length 3517
  Top Layer w20: P6.1@4518,4079 4510,4087 4402,4087 ; P4.2@4617,3881 4617,3906 4617,3959 4596,3980 4447,3980 4402,4025 4402,4087 ; J14.7 6484,3691 P1.1 5770,3691 5690,3611 5345,3611 5211,3745 5211,4205 5081,4335 4704,4335 4661,4378 4468,4378 4356,4266 4356,4133 4402,4087
BPOK: J14.6 P1.2 Q1.3 | length 952.8
  Top Layer w20: Q1.3 5790,3744 5840,3794 6077,3794 6114,3831 J14.6
DC_OK_IND: P7.5 R5.1 R13.1 U1.4 U1.9 U3.6 | length 2144.9
  Top Layer w12: 5262,4451 5263,4451
  Top Layer w20: U1.4 4095,4966 4295,5166 U1.9 4295,5231 4332.2,5268.2 R13.1 ; v1(4280,4635) 4286,4641 4612.6,4641 4612.6,4658.6 4645,4691 4895,4691 4922,4664 5164,4664 5263,4565 U3.6 5263,4451 ; P7.5 5262,4451
  Bottom Layer w20: U1.4@4100.5,4875.5 4290,4686 4290,4666.21 4280,4656.21 v1(4280,4635)
GND: ?.2 C1.2 C2.1 C3.2 C5.1 C6.2 J3.1 J4.1 J6.1 J7.1 J9.7 J9.8 J9.9 J11.1 J12.1 J14.1 J14.2 J14.3 J14.4 J15.1 J15.3 J15.8 J15.9 J23.1 J24.1 J25.1 P1.4 P3.4 P5.4 P7.3 P8.2 Q1.2 Q2.2 Q3.2 R3.2 R6.2 R14.2 R15.2 R18.2 U1.7 U2.3 U3.8 | length 8201
  Top Layer w10: P5.4 5226,3081 v1(5655,2652)
  Top Layer w12: v1(3042,4329) 3042,4253 R15.2@3060,4235 ; v1(3354,4329) 3354,4235.2 R14.2@3354.2,4235 ; v1(4162,4047) 4226.13,4047 Q3.2@4232.72,4053.6 ; R3.2@4717.4,4798.6 R3.2@4719,4797
  Top Layer w20: v1(4408,4211) 4481.4,4211 R18.2 ; C1.2@4602,4798.6 R3.2@4717.4,4798.6 ; R3.2@4719,4797 v1(4797,4797) ; v1(5382,3744) 5421,3705 5491.13,3705 Q1.2 ; v1(5382,3900) 5421,3861 5491.13,3861 Q2.2 ; C5.1@5612,4914 5690,4914 ; C6.2@5631,5010 5674,5010
  Top Layer w25: v1(3511,4962) 3524,4962 3554,4992 C2.1@3588,4992 ; C3.2 4705.22,5213.82 R6.2 4759.6,5187 v1(4797,5187)
  Top Layer w50: 5865,4100 5878,4087 P1.4 ; ?.2@6180,2310 6385,2105
  Top Layer w100: J15.1@6500,3114 6704,3114 ; J15.3@6501,2804 6727,2804
  Bottom Layer w10: v1(5655,2652) 5655,2542.89 5713.61,2484.28 5992.94,2484.28 ; 6046,2440 6106,2440 6159,2387 6364,2387 6364,2091
  Bottom Layer w12: P3.4 5278,5708 5388,5598 5614,5598 5614,5153.89 5627.89,5140 6439,5140 J9.7 ; 5992.94,2484.28 6003.21,2474 6012,2474 6046,2440
  Bottom Layer w50: J25.1 5258,1721 5423,1556 5438.5,1540.5 ; J24.1@5660,1802.08 5660,1793 5438.5,1571.5 5438.5,1540.5 ; 6006,1404 5965,1363 5482,1363 5482,1497 5438.5,1540.5 ; 6008,1406 6009,1406 6009,1407 J23.1@6162,1560
  Bottom Layer w100: J23.1@6162,1560 6438,1560 6500,1622 J15.8@6500,2023
  other v4: 5241,2168 4590,5945
  other v5: 5033,2437 4598,6297
ICSPDAT: P7.4 R12.1 U1.5 U2.4 U3.7 | length 4959.7
  Top Layer w12: P7.4@5285,4396 P7.4
  Top Layer w20: P7.4 5363,4452 U3.7
  Top Layer w25: U2.4@4840,1746 4855.5,1761.5 4855.5,3719.5 4910,3774 v1(4949,3774) 4949,4001 v1(5148,4200) 5098.6,4200 5042.4,4256.2 R12.1
  Bottom Layer w12: 5307,4359 P7.4
  Bottom Layer w20: U1.5 4195,4905 4290,5000 4392,5000 4485,4907 4485,4548 4611.25,4421.75 4636,4421.75 4636,4285 4863.75,4057.25 4863.75,3931 4949,3931 v1(4949,3774) ; v1(5148,4200) 5307,4359
NetC1_1: C1.1 D1.2 R1.2 R3.1 U1.1 | length 1366
  Top Layer w12: C1.1 C1.1@4614.18,4875 ; R3.1 R3.1@4720.6,4875 ; R1.2@4869,4882.6 R1.2
  Top Layer w20: U1.1 3918,4758 4449.43,4758 4554,4862.57 4554,4866 4575.18,4887.18 C1.1 ; C1.1@4614.18,4875 4720.6,4875 R1.2 ; R1.2@4869,4882.6 D1.2
NetC3_1: C3.1 D1.1 R4.2 R6.1 U1.3 | length 1547
  Top Layer w12: C3.1 4601.18,5316.18 4605,5320 C3.1@4605,5304 ; R4.2@4864.2,5302.4 R4.2
  Top Layer w20: U1.3 4017,4859 4017,4836 4044,4809 4419,4809 4524,4914 4524,5304 4536.18,5316.18 C3.1@4601.18,5316.18 ; C3.1@4605,5304 R6.1@4735,5304 ; R6.1 R4.2@4864.2,5302.4 ; D1.1 R4.2@4869,5261.5
NetC4_1: C4.1 D6.1 J18.1 MOV1.1 U2.2 | length 2815.1
  Bottom Layer w50: MOV1.1 3237,2164.64 3237,2106 3183,2052 3183,2028 3307.5,1903.5 3307.5,1528.5 3416,1420 3416,1404 3861,1404 C4.1@4017,1560 ; D6.1 3814.09,1785.18 4034.28,1565 4173,1565 4248,1640 4518,1640 4524,1646 U2.2
NetC4_2: C4.2 F1.1 MOV1.2 R8.1 | length 1818.4
  Bottom Layer w50: C4.2 3448.72,2047.64 MOV1.2 3640,2372.36 R8.1 3640,2626 3834,2820 F1.1
NetC5_2: C5.2 C6.1 D7.3 U3.1 | length 351.8
  Top Layer w20: U3.1 5463,4847 5528,4912 C5.2 5506.82,4937.18 C6.1 5506.82,5055.82 5538.5,5087.5 D7.3
NetD2_2: D2.2 D4.1 | length 156
  Bottom Layer w50: D4.1 D2.2
NetD3_1: D3.1 R8.2 | length 232.1
  Bottom Layer w50: D3.1@4225.91,2300.91 R8.2
NetD3_2: D3.2 R11.1 | length 310.9
  Top Layer w50: R11.1 R11.1@3645,2100.91
  Bottom Layer w50: R11.1 3693.91,2113.91 3693.91,2136.91 3783,2226 3783,2238.91 D3.2
NetD4_2: D4.2 D5.1 | length 150
  Bottom Layer w50: D5.1@5654,2427.91 5735,2427.91 D4.2@5804,2428.42
NetD5_2: D5.2 J20.1 J21.1 J22.1 P2.2 | length 1698.2
  Bottom Layer w50: J22.1 5102,1831 5177,1906 5546,1906 ; J20.1 5523.79,1813.79 5523.79,1883.79 5546,1906 ; P2.2@5645,1493 5645,1635 5707,1697 5780,1697 ; D5.2 5658,1914 ; J21.1@5910,1542 J21.1 5928,1608 5839,1697 5780,1697 ; 5546,1906 5650,1906 5658,1914 ; 5658,1914 5716,1914 5780,1850 5780,1697
NetD6_2: D6.2 R11.2 U2.1 | length 664.5
  Bottom Layer w50: D6.2 R11.2@4395,2024.09 ; R11.2 R11.2@4395,2024.09 ; U2.1 4466,1746 4395,1817 R11.2@4395,2024.09
NetF1_2: F1.2 J16.1 | length 486.7
  Top Layer w50: J16.1@3105,2325 J16.1
  Bottom Layer w50: 3167.63,2381 3235,2448.37 ; 3235,2455 3247.48,2467.48 F1.2@3247.48,2820
NetJ17_1: J17.1 P3.8 P5.8 R19.2 | length 4576.6
  Top Layer w20: P3.8 5182.22,5571 5239,5571 5239,5846 5279.6,5886.6 5279.6,5924 ; R19.2 5279.6,5924 ; J17.1 5961,6264 5847.43,6264 5808.43,6225 5419,6225 5404,6210 5404,5952 5381,5929 5284.6,5929 5279.6,5924
  Bottom Layer w20: P5.8 5291.52,2923.52 5314,2946 5314,3271 5337,3294 5337,3705 5226,3816 5226,3918.28 5228.36,3920.64 5228.36,4056 5103,4181.36 5103,5050 5150,5097 5150,5538.78 P3.8
NetJ19_1: J19.1 P3.7 P5.7 R19.1 | length 4677.5
  Top Layer w20: P5.7 5125.78,2867 5198,2867 5262,2931 v1(5262,2973) ; P3.7 5054.48,5550.52 4997,5608 4997,5853 5399,6255 5796,6255 J19.1 ; 5351.5,6189.5 5351.5,6014.9 R19.1
  Bottom Layer w20: P3.7 5120,5513.52 5120,5120 5068,5068 5068,4327 5073,4322 5073,4168.93 5198.36,4043.57 5198.36,3933.07 5196,3930.71 5196,3803.57 5307,3692.57 5307,3521.43 5299.29,3513.71 5299.29,3320.29 5278,3299 5278,2989 v1(5262,2973)
NetLED1_A: LED1.A R7.1 | length 241.4
  Top Layer w20: LED1.A@3938.66,4053 3938.66,4154.34 3959.32,4175 4005,4175 4017.4,4187.4 R7.1 R7.1@4017.4,4235
NetLED1_K: LED1.K R13.2 U1.8 | length 2737.1
  Top Layer w20: LED1.K@4025.34,4050 4025.34,4125.34 v1(4029,4129) ; U1.8 4395,5331 R13.2
  Bottom Layer w20: v1(4029,4129) 3903,4129 3850,4182 3850,4285 3772,4363 3561,4363 3316,4608 3316,4836 3743,5263 4313,5263 U1.8
NetLED2_A: LED2.A R9.1 | length 257.5
  Top Layer w20: LED2.A 3642,4053.34 3642,4118 3664,4140 3727,4140 R9.1
NetLED2_K: LED2.K R16.2 U1.10 | length 2366.8
  Top Layer w20: v1(3439,4666) 3523,4582 ; LED2.K 3721.34,3996.66 3712.68,3988 3578,3988 3523,4043 3523,4582 ; R16.2 3662,4652 3592,4582 3523,4582
  Bottom Layer w20: v1(3439,4666) 3439,4719 3752,5032 4099,5032 4182.57,5115.57 4182.57,5168.57 U1.10
NetLED3_K: LED3.K R14.1 | length 185.4
  Top Layer w20: LED3.K@3416.34,4050 3417.4,4051.06 R14.1@3417.4,4235
NetLED4_K: LED4.K R15.1 | length 186.2
  Top Layer w20: R15.1@3134.8,4235 3134.8,4052.87 LED4.K
NetP4_1: P4.1 Q3.3 | length 451.8
  Top Layer w20: Q3.3@4323.28,4091 4323.28,3858.28 4342.55,3839 4475,3839 P4.1@4517,3881
NetP6_2: P6.2 R10.2 R18.1 | length 316.8
  Top Layer w20: R18.1@4506,4297 4528,4297 4558,4267 4558,4231 4567.4,4221.6 4625,4221.6 4618,4214.6 4618,4104 P6.2@4618,4079
NetP8_1: P8.1 U3.3 | length 481.2
  Bottom Layer w25: P8.1@5230,5255 5210,5235 5210,5040 5240.5,5009.5 5240.5,4880.54 5263,4858.04 U3.3
NetQ1_1: Q1.1 R2.2 | length 1307.6
  Top Layer w20: R2.2@4652.5,4473.5 4681.53,4444.47 4710.53,4444.47 4787,4368 5090.43,4368 5285,4173.43 5285,3865 5360,3790 5453,3790 5460,3783 5491.13,3783 Q1.1
NetQ2_1: Q2.1 R5.2 | length 1362
  Top Layer w12: 5145,4421.96 5212.53,4489.48 5212.53,4556.04
  Top Layer w20: R5.2@4717.4,4641 4736.4,4622 4777,4622 4786,4613 5155.57,4613 5212.53,4556.04 ; 5145,4421.96 5145,4366 5389.72,4121.28 5389.72,3970.28 5422.6,3937.4 Q2.1
NetQ3_1: Q3.1 R17.2 | length 112.4
  Top Layer w20: R17.2@4228.4,4239 4228.4,4132.72 Q3.1@4232.72,4128.4
NetR17_1: R17.1 U1.6 U3.2 | length 2731.5
  Top Layer w20: R17.1@4226,4310.4 4226,4402 4308,4484 v1(4420,4484) ; U1.6 4290,4886 4290,4953 4485,5148 4485,5352 4521,5388 5025,5388 5047,5366 5047,5073.36 5051.36,5069 v1(5273,5069)
  Bottom Layer w20: U1.6 4295,4792 4368,4719 4368,4535 4419,4484 v1(4420,4484) ; v1(5273,5069) 5273,4894 U3.2
P_OK_IND: R2.1 R16.1 U1.2 U1.11 U3.5 | length 2051.7
  Top Layer w20: U1.2 3895,4981 U1.11 ; R16.1 3985.4,4635 v1(4150,4635) 4229,4556 4687,4556 4711,4532 R2.1@4711,4510 ; R2.1@4724.8,4505 5158,4505 U3.5@5163,4510
  Bottom Layer w20: U1.2 3895,4824 3943,4776 4050,4776 4150,4676 v1(4150,4635)
VCC: 
VPP: P7.1 U3.4 | length 723.1
  Top Layer w12: U3.4 5163,4761 5243.5,4680.5 5467.5,4680.5 5607,4541 P7.1
pads on no net: C1.0 C3.0 C6.0 J14.9 J15.2 P3.1 P3.3 P3.5 P3.6 P5.1 P5.3 P5.5 P5.6 Q1.0 Q2.0 Q3.0 R8.0 R11.0 U1.12 U1.13 U3.0
copper on no net:
  other v2: 3010,1500 6810,1500 3005,6495 6820,6500
  other v3: 3120,1872 3120,2496 5753,6367 6221,6367
  other v6: 3120,2184

## Polygon pours and split planes (outlines as drawn)
GND on Bottom Layer "GND" (hatched 90Degree grid 20 track 8, remove dead copper, pour order 2): 5109,6512.9 5109,5657 5203,5469 5577,5469 5577,5121 6587,5121 6537.61,3639.18 2871.62,3639.18 2848.09,6517.53
GND on Bottom Layer "GND" (hatched 90Degree grid 20 track 8, remove dead copper, pour order 6): 4989.36,3680 5902.95,3680 5902.95,1944 4994.86,1944
GND on Bottom Layer "GND" (hatched 90Degree grid 20 track 8, pour order 12): 4786,3633 4786,1619 4992.02,1619 4992.02,3638.44

## Keep-outs
Keep-Out Layer:
  lines w10: 2790,1301 2791,1302 2791,6698 6999,6698 6999,1301 ; 2791,1300 4645,1300 4645,1877 4745,1877 4745,1300 6998,1300

## Other copper
Top Layer:
  region net +5V: 5673,6092.64 5673,5162.52 6940,5162.52 6940,6102.52 6938.48,6104.04
  region net GND: 6775,5125 5669,5125 5669,4075 6775,4075
  region net GND: 6675,5125 6950,5125 6950,1786 6675,1786
  region net GND: 6160,2106.5 6688,2106.5 6688,1777.5 6160,1777.5
  region net +12V: 5776.7,2598 6055.7,2502 6039.71,2507.41 6225,2430 6610,2430 6610,2716 6400,2716 6400,2825 6400,3450 6620,3450 6620,3595 6615,3600 5776.7,3600
  pour cut-out: 5654,4669 5654,4505 5657,4508 5712,4508 5712,4668 5714,4670
Bottom Layer:
  pour cut-out: 5614.1,2693 5689,2693 5689,2618 5614,2618 5613,2617
  pour cut-out: 5110,3119 5110,3040 5194,3040 5192,3042 5192,3119
  pour cut-out: 5133,3148 5133,3060 5232,3060 5232,3148
  region net +5V: 6387,2401 6387,2115 6952,2115 6952,6074 6941,6085 5657,6085 5657,5183 6652,5183 6652,2401
  region net GND: 5655,5120 6620,5120 6620,4070 5655,4070
  region net GND: 6949,2096 6164,2096 6164,1778.5 6949,1778.5
  pour cut-out: 2808,6552 3237,6552 3237,6318 2808,6318
  region net +12V: 5779.5,2598 5779.5,2731.5 5777,2938 5777,3595 5772,3600 6615,3600 6620,3595 6620,3445.54 6369,3445.54 6374,2715 6599,2715 6610,2432 6236.5,2432

## Silkscreen, mask and mechanical layers (free items; w line width, h text height)
Top Overlay:
  drawing of 161 lines, arcs and shapes, not listed
  text "H7864 Main Board" at 4870,6550 h120
  text "B-1" at 4112,6515 h120
  text "Remote / Power On" at 5792,6484 h50
  text "Revision B-1" at 5170,6450 h120
  text "Alon Gendel 2023" at 5140,6370 h80
  text "www.microvax2.org" at 5053.03,6295 h90
  text "+" at 5847,6146 h260
  text "-" at 6054,6143 h260
  text "+5V" at 5593,5548 h290 r90
  text "+S / -S /  /  / CNT-" at 5247,5465 h45
  text "+Vm / -Vm /  /  / CNT+" at 4704,5457 h45
  text "5V CN1" at 5074,5381 h50
  text "+" at 4520,5340 h40
  text "+" at 5430,5040 h40
  text "+" at 4530,4910 h40
  text "+" at 4407,4875 h40
  text "SN74AC14N" at 3877,4744 h60
  text "PIC12F675" at 5073,4435 h60 r90
  text "IN:Pullup / OUT:Open Collector" at 4730,3990 h40
  text "GND" at 5986,3963 h100
  text "5V" at 3060,3886.99 h50
  text "12V" at 3300,3886.99 h50
  text "DCOK" at 5986,3866 h100
  text "POK" at 3548,3835 h50
  text "DCOK" at 3853,3835 h50
  text "IN:Enabled / OUT:Disabled" at 4740,3810 h40
  text "POK" at 5986,3758 h100
  text "LTC" at 4493,3710 h60
  text "EVENTL" at 5986,3656 h100
  text "WARNING - For Continued Protection / Against Fire Replace Only With Same Type  / and Rating of Fuse" at 2886,3354 h50
  text "230V 63mA" at 3655,3070 h60
  text "+12V" at 5742,2879 h290 r90
  text "+Vm / -Vm /  /  / CNT+" at 4691,2851 h45
  text "+S / -S /  /  / CNT-" at 5260,2837 h45
  text "12V CN1" at 5032,2691 h50
  text "L" at 2856,2312 h60
  text "N" at 2852,1991 h60
  text "FRONT FAN" at 5092,1914 h100
  text "+" at 5066,1611 h200
  text "+" at 5382,1611 h200
  text "-" at 5549,1608 h200
  text "-" at 5252,1606.7 h200
  text "OUT:10V" at 5265,1495 h40
  text "TOP / FAN" at 6290,1480 h100
  text "IN:12V" at 5314,1419 h40
  text "+" at 5890,1390 h200
  text "-" at 6160,1390 h200
  text "LTV816" at 4440,1384 h60 r90
  text "SPEED" at 5530,1320 h60